# Altium PCB PCB_MedicalThings_3_2022-05-04.pcbdoc
Units mil, origin at the board's own origin, x right, y up, seen from the top; angles counter-clockwise.
Board outline 6035 x 5207.5 mil, 2 copper layers (Top Layer, Bottom Layer); 117 components, 94 nets, 512 pads, 273 vias.
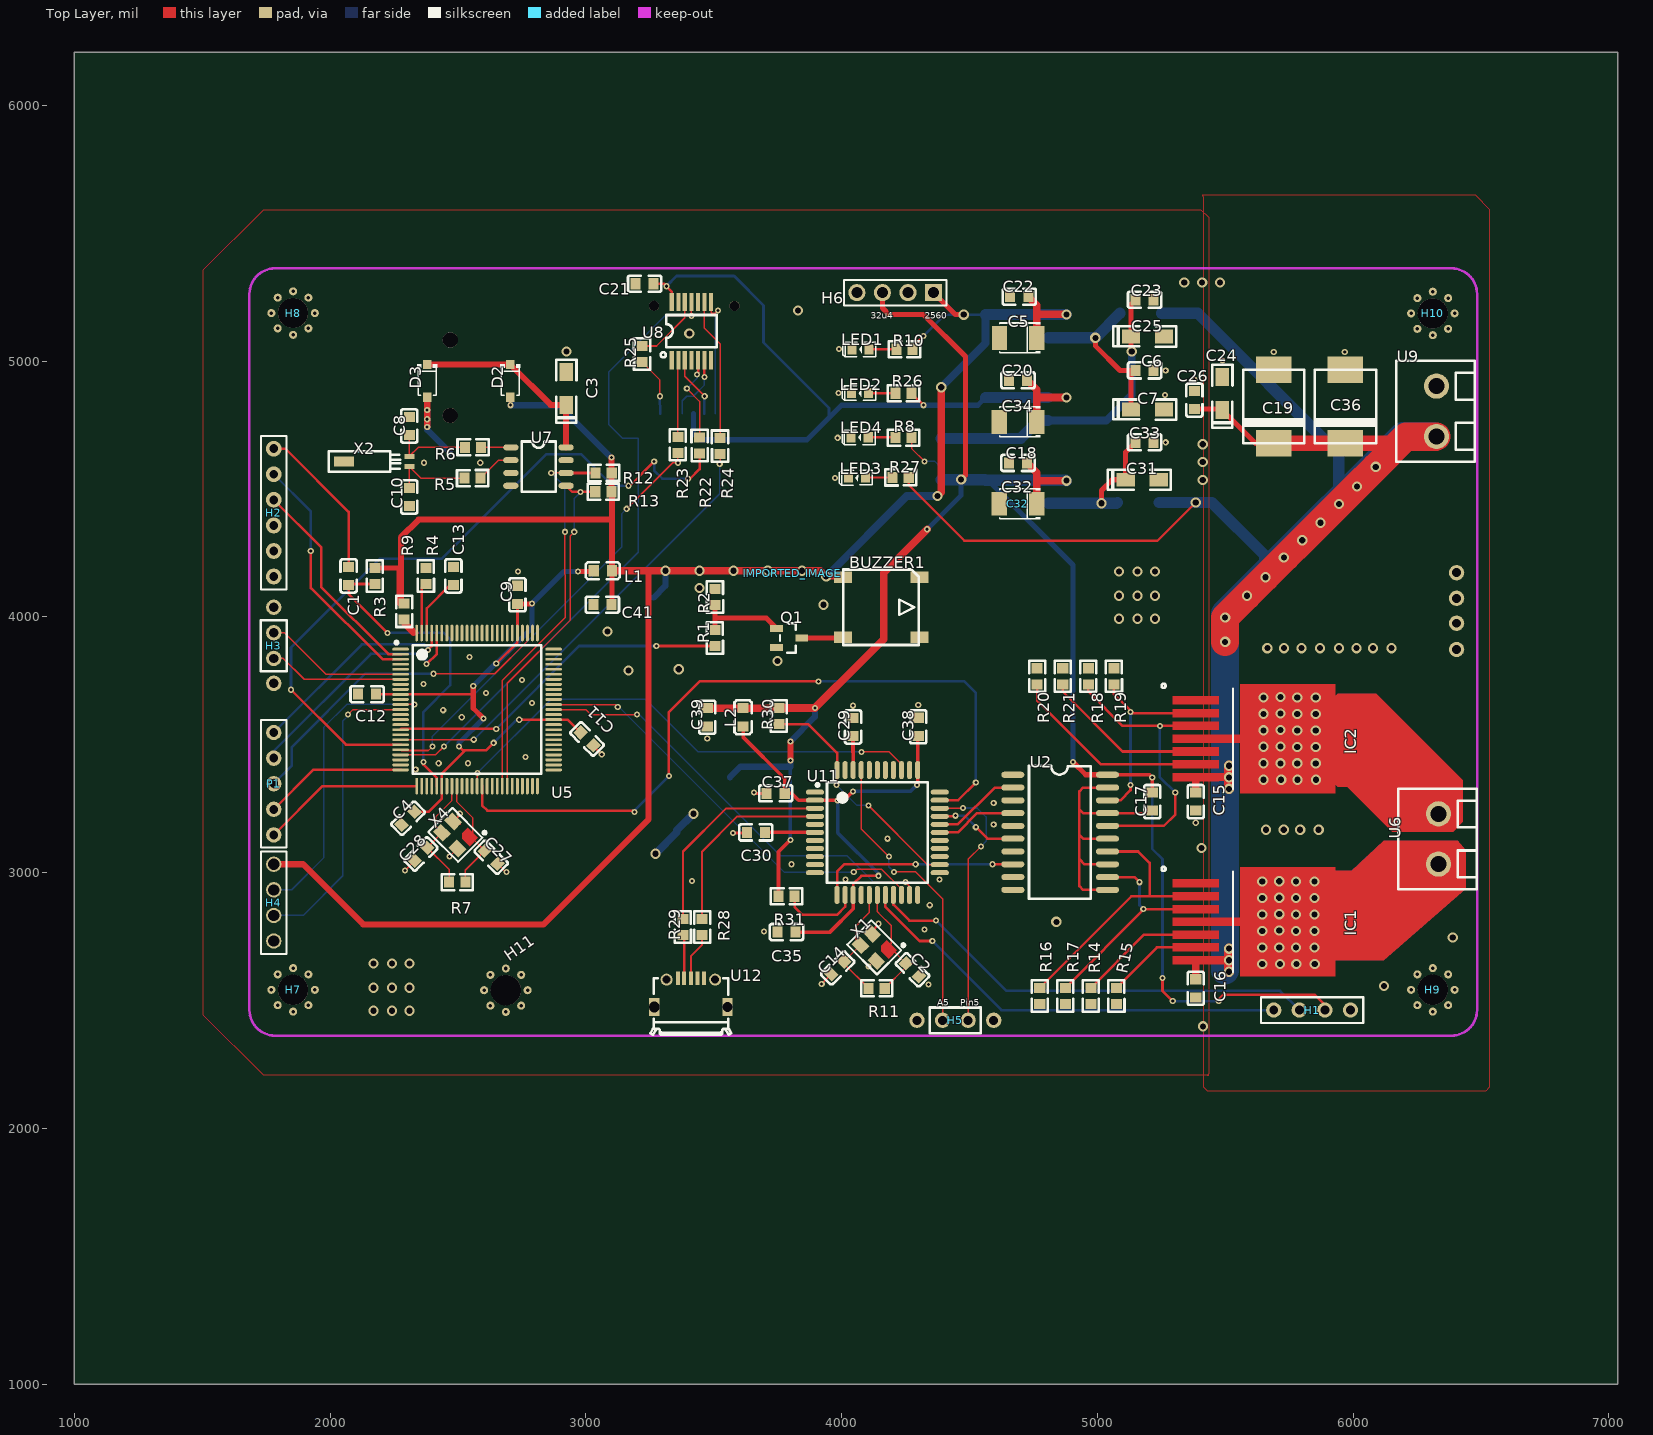
[diagram p0: Top Layer view]
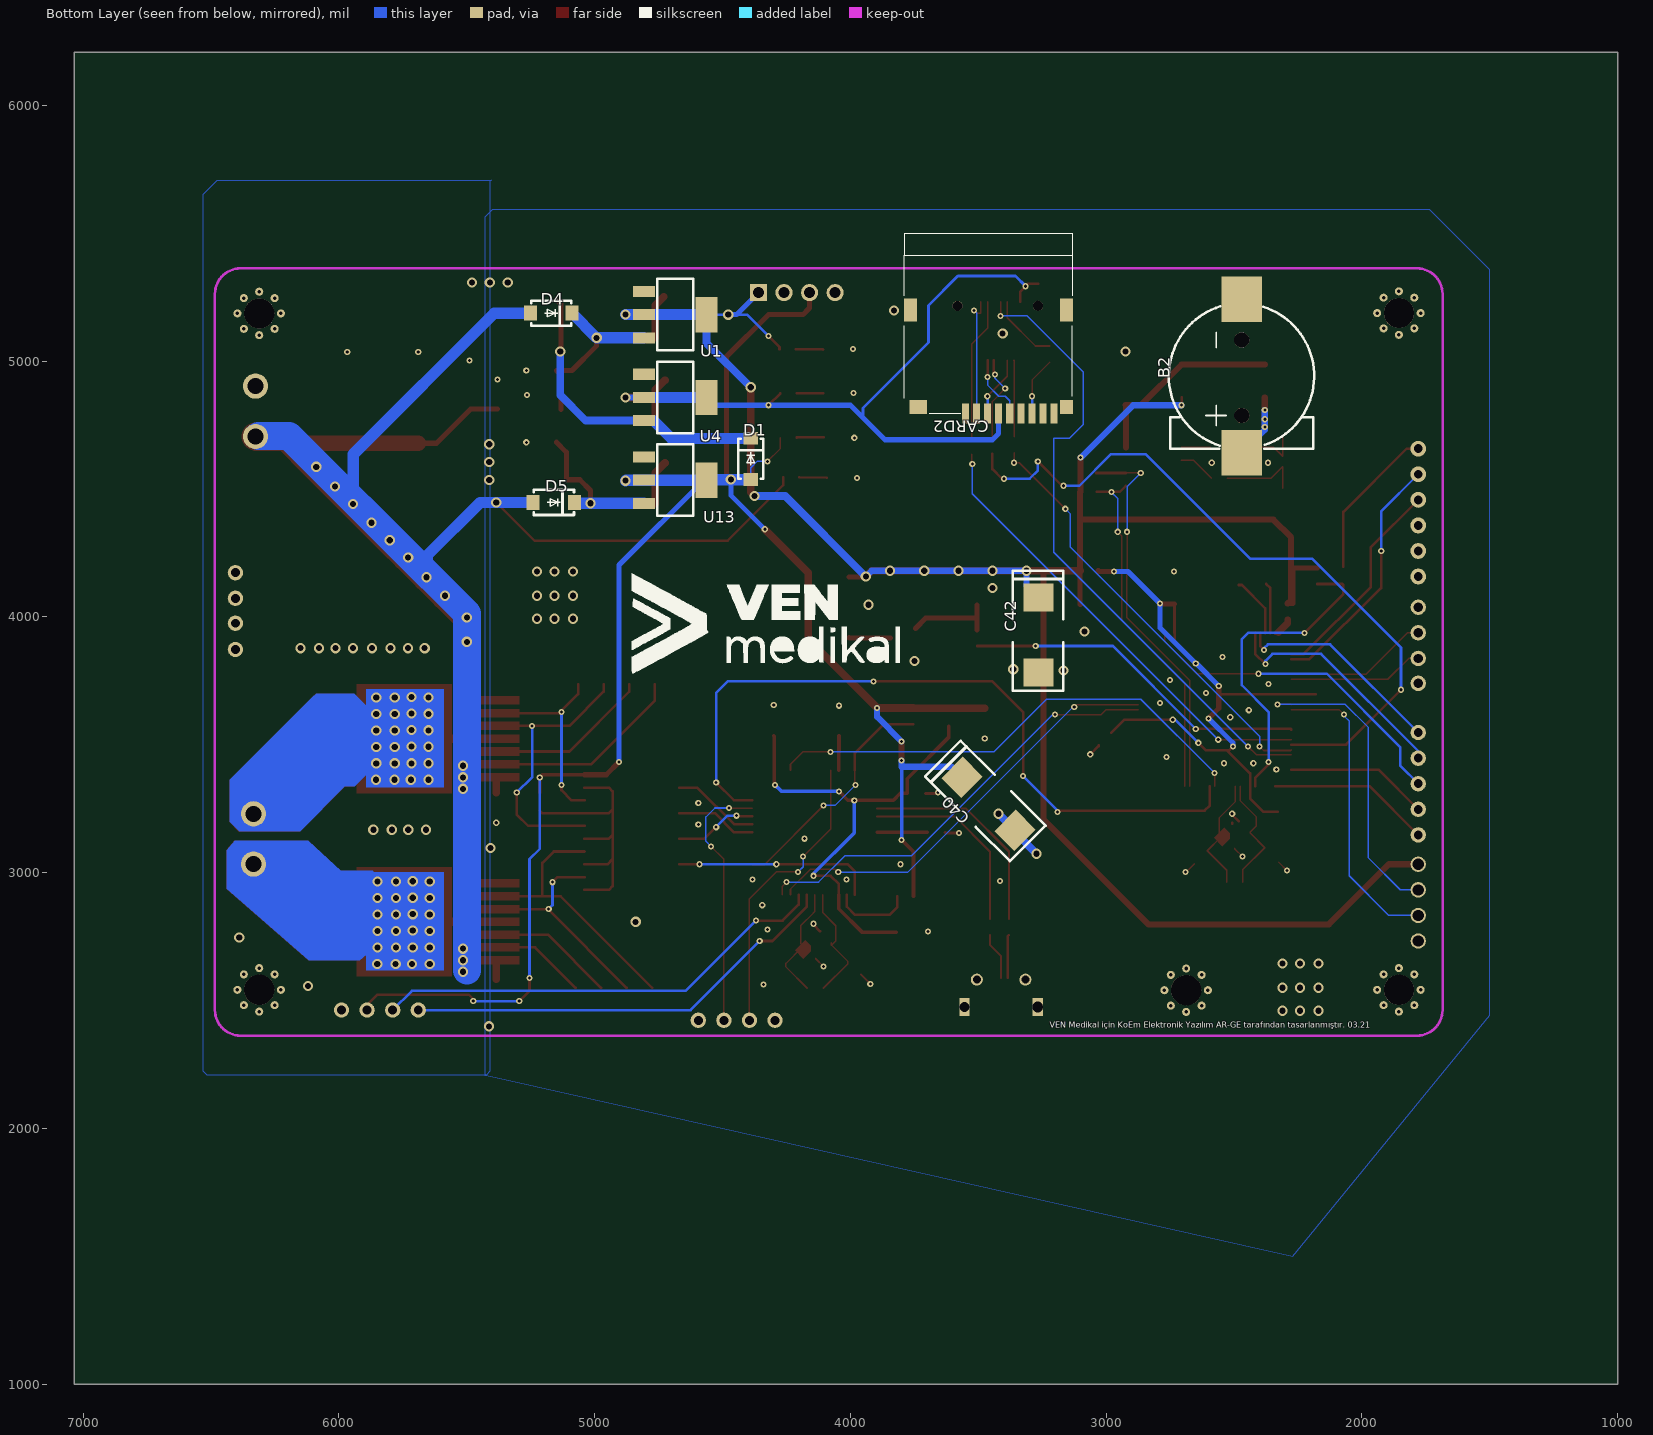
[diagram p1: Bottom Layer view, seen from below]

## Layer stack, top to bottom
Top Layer: signal copper (thickness not stored)
Dielectric: dielectric 12.6, FR-4, Dk 4.8
Bottom Layer: signal copper (thickness not stored)

## Board outline
7035,1000 1000,1000 1000,6207.5 7035,6207.5

## Components (designator, comment, footprint, x,y, rotation, side; value= is the part's Value field where it differs from the comment)
B2 "CR1220-2" BAT-SMD_CR1220-2 2470,4941.25 r270 bottom
BUZZER1 "BUZZER 7.5X7.5X2.5MM" SMD-BUZZER-7.5X7.5X2.5 4155,4037.5 r0 top
C1 "100n" C0603 2072.5,4160 r90 top
C2 "22p" C0603 4277.5,2620 r135 top
C3 "10uF" CASE-A_3216 2925,4897.5 r270 top
C4 "100n" C0603 2305,3212.5 r45 top
C5 "22uF" CASE-B_3528 4690.39,5090.86 r180 top
C6 "100n" C0603 5185,4963.52 r180 top
C7 "10uF" CASE-A_3216 5200.8,4809.89 r180 top
C8 "10p" C0603 2310,4746.25 r270 top
C9 "100n" C0603 2732.86,4086.08 r270 top
C10 "10p" C0603 2310,4468.75 r90 top
C11 "100n" C0603 3005,3522.5 r135 top
C12 "100n" C0603 2145,3697.5 r0 top
C13 "100n" C0603 2482.5,4160 r90 top
C14 "22p" C0603 3985,2627.5 r45 top
C15 "470n" C0603 5385,3277.5 r90 top
C16 "470n" C0603 5385,2547.5 r90 top
C17 "100n" C0603 5215,3277.5 r270 top
C18 "22uF" CASE-B_3528 4690,4762.63 r180 top
C19 "330uF" CASE-V_7361 5690,4822.5 r90 top
C20 "100n" C0603 4690,4925.18 r0 top
C21 "100n" C0603 3230,5302.5 r180 top
C22 "100n" C0603 4695,5251.85 r0 top
C23 "100n" C0603 5185,5239.87 r0 top
C24 "10uF" CASE-A_3216 5490,4877.5 r270 top
C25 "10uF" CASE-A_3216 5200.8,5095.44 r180 top
C26 "0.1u" C0603 5380,4847.5 r270 top
C27 "22p" C0603 2630,3060 r135 top
C28 "22p" C0603 2355,3072.5 r45 top
C29 "100n" C0603 4045,3569.47 r90 top
C30 "1u" C0603 3665,3156.97 r180 top
C31 "10uF" CASE-A_3216 5180,4535 r180 top
C32 "22uF" CASE-B_3528 4690,4442.22 r180 top
C33 "100n" C0603 5185,4682.5 r180 top
C34 "100n" C0603 4690,4601.64 r0 top
C35 "100n" C0603 3785,2767.5 r180 top
C36 "330uF" CASE-V_7361 5970,4822.5 r90 top
C37 "100n" C0603 3742.5,3310 r0 top
C38 "100n" C0603 4300,3570 r90 top
C39 "10u" C0603 3475,3607.5 r270 top
C40 "1u" CASE-D_7343 3468.75,3263.75 r225 bottom
C41 "10u" C0603 3065,4047.5 r0 top
C42 "1u" CASE-D_7343 3275,3931.25 r270 bottom
CARD2 "TF-01A" TF-SMD_TF-01A 3460,4997.5 r180 bottom
D1 "M7" SMA(DO-214AC) 4390,4617.5 r270 bottom
D2 "1N4148W" SOD-123_L3.1-W1.7-LS3.7-RD 2705,4922.5 r270 top
D3 "1N4148W" SOD-123_L3.1-W1.7-LS3.7-RD 2380,4922.5 r270 top
D4 "M7" SMA(DO-214AC) 5170,5187.5 r0 bottom
D5 "M7" SMA(DO-214AC) 5160,4447.5 r0 bottom
H1 "Header-Male-2.54_1x4" HDR-TH_4P-P2.54-V#1 5840,2462.5 r180 top
H2 "HDR-F-2.54_1x6" HDR-F-2.54_1X6 1780,4457.5 r270 top
H3 "Header-Male-2.54_1x2" HDR-TH_2P-P2.54-V#1 1780,3887.5 r270 top
H4 "Header-Male-2.54_1x4" HDR-TH_4P-P2.54-V#2 1780,2882.5 r270 top
H5 "Header-Male-2.54_1x2" HDR-TH_2P-P2.54-V#2 4445,2422.5 r0 top
H6 "Header-Male-2.54_1x4" HDR-TH_4P-P2.54-V#3 4210,5267.5 r180 top
H7 "3_2MMMOUNTHOLE COPY" HOLE_3.0IDX5.8OD 1855.69,2541.61 r0 top
H8 "3_2MMMOUNTHOLE COPY" HOLE_3.0IDX5.8OD 1855.69,5187.77 r0 top
H9 "3_2MMMOUNTHOLE COPY" HOLE_3.0IDX5.8OD 6311.8,2541.61 r0 top
H10 "3_2MMMOUNTHOLE COPY" HOLE_3.0IDX5.8OD 6311.8,5186.2 r0 top
H11 "3_2MMMOUNTHOLE COPY" HOLE_3.0IDX5.8OD 2687.5,2540 r0 top
IC1 "BTS7960B-BTS7960B" PG-TO263-7 5545,2857.5 r90 top
IC2 "BTS7960B-BTS7960B" PG-TO263-7 5545.01,3573.49 r90 top
IMPORTED_IMAGE "IMPORTED_IMAGE" IMPORTED_IMAGE 3806.57,4171.07 r0 top
L1 "10uH" L0603 3066.56,4180.35 r0 top
L2 "10uH" L0603 3615,3607.5 r90 top
LED1 "LED-0603_R" LED0603_RED 4074.06,5045.37 r180 top
LED2 "LED-0603_R" LED0603_RED 4072.5,4875 r180 top
LED3 "LED-0603_R" LED0603_RED 4060,4544.22 r180 top
LED4 "LED-0603_R" LED0603_RED 4070.94,4702.08 r180 top
P1 "2.54mm 1*5P Header" HDR-TH_5P-P2.54-V 1780,3347.5 r270 top
Q1 "2222ALT1G" SOT-23-3_L2.9-W1.3-P1.90-LS2.4-BR 3795,3917.5 r180 top
R1 "820" R0603 3505,3917.5 r90 top
R2 "47k" R0603 3505,4077.5 r270 top
R3 "10k" R0603 2175.05,4159.99 r90 top
R4 "0" R0603 2375,4159.99 r90 top
R5 "40.2k" R0603 2557.5,4542.5 r0 top
R6 "40.2k" R0603 2559.38,4662.5 r0 top
R7 "1M" R0603 2497.5,2962.5 r180 top
R8 "1k" R0603 4242.3,4700.76 r180 top
R9 "0" R0603 2290,4021.25 r90 top
R10 "1k" R0603 4245.99,5046.23 r180 top
R11 "1M" R0603 4137.5,2547.5 r180 top
R12 "10k" R0603 3070,4562.5 r0 top
R13 "10k" R0603 3068.44,4489.04 r0 top
R14 "10k" R0603 4975,2517.5 r90 top
R15 "10k" R0603 5075,2517.5 r90 top
R16 "10k" R0603 4775,2517.5 r90 top
R17 "10k" R0603 4875,2517.5 r90 top
R18 "10k" R0603 4965,3767.5 r270 top
R19 "10k" R0603 5065,3767.5 r270 top
R20 "10k" R0603 4765,3767.5 r270 top
R21 "10k" R0603 4865,3767.5 r270 top
R22 "3.3k" R0603 3445,4670.01 r270 top
R23 "3.3k" R0603 3360,4672.5 r270 top
R24 "3.3k" R0603 3525,4667.5 r90 top
R25 "3.3k" R0603 3220,5027.5 r90 top
R26 "1k" R0603 4242.4,4874.3 r180 top
R27 "1k" R0603 4231.36,4545.18 r180 top
R28 "22" R0603 3455,2787.5 r90 top
R29 "22" R0603 3380,2787.5 r90 top
R30 "0" R0603 3755,3611.96 r90 top
R31 "10k" R0603 3785,2907.5 r180 top
U1 "AMS1117-5.0" SOT-223_L6.7-W3.5-P2.30-BR 4684.92,5181.52 r180 bottom
U2 "74HC244D,653" SOIC-20_L13.0-W7.6-P1.27-LS10.6-BL 4855,3157.5 r270 top
U4 "AMS1117-3.3_C369933" SOT-223_L6.7-W3.5-P2.30-BR 4684.92,4857.97 r180 bottom
U5 "ATMEGA2560-16AU" TQFP-100_L14.0-W14.0-P0.50-LS16.0-BL 2575,3637.5 r270 top
U6 "DB126V-5.0-2P" CONN-TH_2P-P5.00_L7.8-W10.0 6334.12,3131.44 r90 top
U7 "PCF8563T/5,518" SOIC-8_L5.0-W4.0-P1.27-LS6.0-BL 2815,4587.5 r270 top
U8 "74LVC125APW,118" TSSOP-14 3419,5115.5 r90 top
U9 "DB126V-5.0-2P" CONN-TH_2P-P5.00_L7.8-W10.0 6326.25,4803.75 r90 top
U11 "ATMEGA32U4-AU" QFP-44_L10.0-W10.0-P0.80-LS13.2-BL 4140,3156.97 r270 top
U12 "USB" "MICRO USB" 3385,2487.5 r0 top
U13 "AMS1117-5.0" SOT-223_L6.7-W3.5-P2.30-BR 4684.92,4534.43 r180 bottom
X1 "16MHz" OSC-SMD_4P-L3.2-W2.5-BL 4127.5,2707.5 r135 top
X2 "32.768KHz" OSC-TH_BD2.0-P0.70-D0.3 2295,4607.5 r0 top
X4 "16MHz" OSC-SMD_4P-L3.2-W2.5-BL 2490,3147.5 r135 top

## Footprints (in the part's own frame and the unit in brackets; to place one, negate y for a bottom-side part, rotate by r counter-clockwise, add the part's x,y. Pads: shape width x height; smd on the part's side, far side on the other; paste and mask are expansions set on the pad)
BAT-SMD_CR1220-2 [mm]
  rect 4.5x4 smd: 1(7.62,0) 2(-7.62,0)
  round 1.5 hole 1.5 unplated: ""(-3.581,0) ""(3.912,0)
  silkscreen extent -6.92,-7.25 7.22,7.19
C0603 [mm]
  rect 1x1.1 smd: 1(-0.9,0) 2(0.9,0)
  silkscreen extent -1.65,-0.8 1.65,0.8
CASE-A_3216 [mil]
  rect 71.5x53.5 smd: 1(69,-1) 2(-60,-1)
  silkscreen extent -107,-40 139,39
CASE-B_3528 [mil]
  rect 59.3x93.54 smd: 1(-73.25,0) 2(73.25,0)
  silkscreen extent -87,-61 72,61
CASE-D_7343 [mil]
  rect 110.2x118.5 smd: 1(-144,10) 2(149,10)
  silkscreen extent -249,-90 220,107
CASE-V_7361 [mm]
  rect 2.6x3.5 smd: 1(-3.65,0) 2(3.65,0)
  silkscreen extent -3.65,-3.05 3.65,3.05
CONN-TH_2P-P5.00_L7.8-W10.0 [mm]
  round 2.5 hole 1.6: 1(-2.5,0) 2(2.5,0)
  silkscreen extent -5,-3.8 5,4
HDR-F-2.54_1X6 [mil]
  round 62 hole 35: 1(-200,0) 2(-100,0) 3(0,0) 4(100,0) 5(200,0) 6(300,0)
  silkscreen extent -250,-50 350,50
HDR-TH_2P-P2.54-V#1 [mil]
  round 60 hole 36: 1(-50,0) 2(50,0)
  silkscreen extent -100,-50 100,50
HDR-TH_2P-P2.54-V#2 [mil]
  round 60 hole 35: 1(-50,0) 2(50,0)
  silkscreen extent -100,-50 100,50
HDR-TH_4P-P2.54-V#1 [mil]
  round 60 hole 35: 1(-150,0) 2(-50,0) 3(50,0) 4(150,0)
  silkscreen extent -200,-50 200,50
HDR-TH_4P-P2.54-V#2 [mil]
  round 60 hole 43.31: 1(-150,0) 2(-50,0) 3(50,0) 4(150,0)
  silkscreen extent -200,-50 200,50
HDR-TH_4P-P2.54-V#3 [mil]
  rect 66.93x66.93 hole 43.31: 1(-150,0)
  round 66.93 hole 43.31: 2(-50,0) 3(50,0) 4(150,0)
  silkscreen extent -200,-50 200,50
HDR-TH_5P-P2.54-V [mil]
  round 60 hole 35: 1(-200,0) 2(-100,0) 3(0,0) 4(100,0) 5(200,0)
  silkscreen extent -250,-50 250,50
HOLE_3.0IDX5.8OD [mm]
  round 0.8 hole 0.35: 1(-2.159,0) 1(-1.53,-1.527) 1(-1.527,1.527) 1(0,-2.159) 1(0,2.159) 1(1.525,-1.527) 1(1.527,1.527) 1(2.159,0)
  round 3 hole 3 unplated: ""(0,0)
IMPORTED_IMAGE [mil]
L0603 [mm]
  rect 1x1.1 smd: 1(-0.9,0) 2(0.9,0)
  silkscreen extent -1.68,-0.85 1.68,0.85
LED0603_RED [mm]
  rect 0.9x1 smd: 1(-0.85,0) 2(0.85,0)
  silkscreen extent -1.54,-0.73 1.75,0.73
"MICRO USB" [mil]
  rect 15.7x53.1 smd: 1(-25,100) 2(0,100) 3(26,100) 4(52,100) 5(77,100)
  rect 40x72 hole 40 slot 41 at 90 deg: 5(-117,-13)
  round 47.2 hole 31.4: 5(-69,94) 5(121,94)
  rect 40x72 hole 40: 5(169,-13)
  silkscreen extent -132,-122 184,99
OSC-SMD_4P-L3.2-W2.5-BL [mm]
  round 0 smd: 1(-1.1,-0.8)
  rect 1.4x1.15 smd: 2(1.1,-0.8) 3(1.1,0.8) 4(-1.1,0.8)
  Top Layer region: -1.8,-0.225 -0.762,-0.225 -0.4,-0.604 -0.4,-1.375 -1.8,-1.375
  silkscreen extent -2.1,-2.35 2.1,1.7
OSC-TH_BD2.0-P0.70-D0.3 [mm]
  rect 1x0.5 smd: 1(0.381,0.508) 2(0.381,-0.508)
  rect 2x1 smd: ""(-6.096,0)
  silkscreen extent -7.6,-1 -0.54,1
PG-TO263-7 [mil]
  round 0 smd: 1(99.99,160.24) 2(49.99,160.24) 3(-0.01,160.24) 4(-50.01,160.24) 5(-100.01,160.24) 6(-150.01,160.24) 7(-200.01,160.24) 8(-50.01,-199.99)
  Top Layer region: 115.74,69.69 84.24,69.69 84.24,250.79 115.74,250.79
  Top Layer region: 65.74,69.69 34.24,69.69 34.24,250.79 65.74,250.79
  Top Layer region: 15.74,69.69 -15.76,69.69 -15.76,250.79 15.74,250.79
  Top Layer region: -34.26,69.69 -65.76,69.69 -65.76,250.79 -34.26,250.79
  Top Layer region: -84.26,69.69 -115.76,69.69 -115.76,250.79 -84.26,250.79
  Top Layer region: -134.26,69.69 -165.76,69.69 -165.76,250.79 -134.26,250.79
  Top Layer region: -184.26,69.69 -215.76,69.69 -215.76,250.79 -184.26,250.79
  Top Layer region: 162.59,-14.95 162.59,-385.03 -262.61,-385.03 -262.61,-14.95
  silkscreen extent -247,14 165,294
QFP-44_L10.0-W10.0-P0.80-LS13.2-BL [mm]
  oval 0.5x1.8 smd: 1(-4,-6.2) 2(-3.2,-6.2) 3(-2.4,-6.2) 4(-1.6,-6.2) 5(-0.8,-6.2) 6(0,-6.2) 7(0.8,-6.2) 8(1.6,-6.2) 9(2.4,-6.2) 10(3.2,-6.2) 11(4,-6.2) 23(4,6.2) 24(3.2,6.2) 25(2.4,6.2) 26(1.6,6.2) 27(0.8,6.2) 28(0,6.2) 29(-0.8,6.2) 30(-1.6,6.2) 31(-2.4,6.2) 32(-3.2,6.2) 33(-4,6.2)
  oval 1.8x0.5 smd: 12(6.2,-4) 13(6.2,-3.2) 14(6.2,-2.4) 15(6.2,-1.6) 16(6.2,-0.8) 17(6.2,0) 18(6.2,0.8) 19(6.2,1.6) 20(6.2,2.4) 21(6.2,3.2) 22(6.2,4) 34(-6.2,4) 35(-6.2,3.2) 36(-6.2,2.4) 37(-6.2,1.6) 38(-6.2,0.8) 39(-6.2,0) 40(-6.2,-0.8) 41(-6.2,-1.6) 42(-6.2,-2.4) 43(-6.2,-3.2) 44(-6.2,-4)
  silkscreen extent -5,-6.08 5,5
R0603 [mm]
  rect 1x1.1 smd: 1(-0.8,0) 2(0.8,0)
  silkscreen extent -1.55,-0.8 1.55,0.81
SMA(DO-214AC) [mil]
  rect 50x57.9 smd: 1(81,0) 2(-81,0)
  silkscreen extent -79,-49 78,49
SMD-BUZZER-7.5X7.5X2.5 [mm]
  rect 1.78x1.15 smd: 1(-3.8,3) 2(-3.8,-3) 3(3.8,-3) 4(3.8,3)
  silkscreen extent -3.75,-3.75 3.75,3.75
SOD-123_L3.1-W1.7-LS3.7-RD [mm]
  rect 0.91x0.84 smd: 1(-1.63,0) 2(1.63,0)
  silkscreen extent -1.63,-0.98 1.4,0.98
SOIC-8_L5.0-W4.0-P1.27-LS6.0-BL [mm]
  oval 0.6x1.52 smd: 1(-1.905,-2.74) 2(-0.635,-2.74) 3(0.635,-2.74) 4(1.905,-2.74) 5(1.905,2.74) 6(0.635,2.74) 7(-0.635,2.74) 8(-1.905,2.74)
  silkscreen extent -2.49,-1.67 2.5,1.7
SOIC-20_L13.0-W7.6-P1.27-LS10.6-BL [mm]
  oval 0.6x2.3 smd: 1(-5.715,-4.7) 2(-4.445,-4.7) 3(-3.175,-4.7) 4(-1.905,-4.7) 5(-0.635,-4.7) 6(0.635,-4.7) 7(1.905,-4.7) 8(3.175,-4.7) 9(4.445,-4.7) 10(5.715,-4.7) 11(5.715,4.7) 12(4.445,4.7) 13(3.175,4.7) 14(1.905,4.7) 15(0.635,4.7) 16(-0.635,4.7) 17(-1.905,4.7) 18(-3.175,4.7) 19(-4.445,4.7) 20(-5.715,4.7)
  silkscreen extent -6.6,-3.1 6.6,3.05
SOT-23-3_L2.9-W1.3-P1.90-LS2.4-BR [mm]
  rect 1.25x0.7 smd: 1(1.25,-0.95) 2(1.25,0.95) 3(-1.25,0)
  silkscreen extent -0.65,-1.46 0.9,1.46
SOT-223_L6.7-W3.5-P2.30-BR [mm]
  rect 2.2x1.1 smd: 1(-3.099,2.3) 2(-3.099,0) 3(-3.099,-2.3)
  rect 2.2x3.5 smd: 4(3.099,0)
  silkscreen extent -1.8,-3.55 1.8,3.55
TF-SMD_TF-01A [mm]
  rect 0.7x2 smd: 1(-2.292,-5.145) 2(-1.192,-5.143) 3(-0.096,-5.145) 4(1.004,-5.145) 5(2.103,-5.145) 6(3.201,-5.145) 7(4.297,-5.145) 8(5.395,-5.145) 9(6.499,-5.145)
  rect 1.27x1.397 smd: 10(7.747,-4.507)
  rect 1.27x2.286 smd: 11(7.747,5.145) 12(-7.747,5.145)
  rect 1.778x1.397 smd: 13(-6.985,-4.507)
  round 1 hole 1 unplated: ""(-3.084,5.554) ""(4.915,5.557)
  silkscreen extent -8.39,-5.14 8.31,12.76
TQFP-100_L14.0-W14.0-P0.50-LS16.0-BL [mm]
  oval 0.28x1.65 smd: 1(-6,-7.6) 2(-5.5,-7.6) 3(-5,-7.6) 4(-4.5,-7.6) 5(-4,-7.6) 6(-3.5,-7.6) 7(-3,-7.6) 8(-2.5,-7.6) 9(-2,-7.6) 10(-1.5,-7.6) 11(-1,-7.6) 12(-0.5,-7.6) 13(0,-7.6) 14(0.5,-7.6) 15(1,-7.6) 16(1.5,-7.6) 17(2,-7.6) 18(2.5,-7.6) 19(3,-7.6) 20(3.5,-7.6) 21(4,-7.6) 22(4.5,-7.6) 23(5,-7.6) 24(5.5,-7.6) 25(6,-7.6) 51(6,7.6) 52(5.5,7.6) 53(5,7.6) 54(4.5,7.6) 55(4,7.6) 56(3.5,7.6) 57(3,7.6) 58(2.5,7.6) 59(2,7.6) 60(1.5,7.6) 61(1,7.6) 62(0.5,7.6) 63(0,7.6) 64(-0.5,7.6) 65(-1,7.6) 66(-1.5,7.6) 67(-2,7.6) 68(-2.5,7.6) 69(-3,7.6) 70(-3.5,7.6) 71(-4,7.6) 72(-4.5,7.6) 73(-5,7.6) 74(-5.5,7.6) 75(-6,7.6)
  oval 1.65x0.28 smd: 26(7.6,-6) 27(7.6,-5.5) 28(7.6,-5) 29(7.6,-4.5) 30(7.6,-4) 31(7.6,-3.5) 32(7.6,-3) 33(7.6,-2.5) 34(7.6,-2) 35(7.6,-1.5) 36(7.6,-1) 37(7.6,-0.5) 38(7.6,0) 39(7.6,0.5) 40(7.6,1) 41(7.6,1.5) 42(7.6,2) 43(7.6,2.5) 44(7.6,3) 45(7.6,3.5) 46(7.6,4) 47(7.6,4.5) 48(7.6,5) 49(7.6,5.5) 50(7.6,6) 76(-7.6,6) 77(-7.6,5.5) 78(-7.6,5) 79(-7.6,4.5) 80(-7.6,4) 81(-7.6,3.5) 82(-7.6,3) 83(-7.6,2.5) 84(-7.6,2) 85(-7.6,1.5) 86(-7.6,1) 87(-7.6,0.5) 88(-7.6,0) 89(-7.6,-0.5) 90(-7.6,-1) 91(-7.6,-1.5) 92(-7.6,-2) 93(-7.6,-2.5) 94(-7.6,-3) 95(-7.6,-3.5) 96(-7.6,-4) 97(-7.6,-4.5) 98(-7.6,-5) 99(-7.6,-5.5) 100(-7.6,-6)
  silkscreen extent -6.8,-8.15 6.37,6.37
TSSOP-14 [mil]
  rect 71x16 smd: 1(-112,83) 2(-112,57) 3(-112,32) 4(-112,6) 5(-112,-20) 6(-112,-45) 7(-112,-71) 8(116,-71) 9(116,-45) 10(116,-20) 11(116,6) 12(116,32) 13(116,57) 14(116,83)
  silkscreen extent -101,-92 65,126

## Free pads (board coordinates)
  round 60 hole 36: 2(1779.99,4037.5) 2(1780,3740.01)
  round 60 hole 35: 2(4295,2422.5) 2(4595,2422.5) 2(6405,3872.5) 2(6405,3975) 2(6405,4072.5) 2(6405,4172.5)

## Via types
v1: diameter 24, hole 12, Top Layer to Bottom Layer, tented both sides, 140 vias
v2: diameter 40, hole 24, Top Layer to Bottom Layer, tented both sides, 133 vias

## Nets (pads, with @x,y where several pads share a name; then routed paths per layer and width w, separated by ;. In a path a pad name is that pad's centre, name@x,y a point inside that pad or via, vN(x,y) a via of type N, cw(c..) or ccw(c..) an arc to the next point about the centre after c; other vN are vias at no path point)
3.3V: C18.1 C20.2 C21.1 CARD2.4 R26.1 U4.2 U4.4 U8.14 | length 3069.5
  Top Layer w10: C21.1 3305,5302.5 3336,5271.5 U8.14 ; R26.1 4273.9,4873.6 v1(4320,4827.5)
  Top Layer w30: C20.2 4763.25,4887.37 C18.1@4763.25,4762.63 ; 4763.25,4857.5 v2@4870,4857.5
  Bottom Layer w12: v1(3315,5292.5) 3355,5332.5 3580,5332.5 3695,5217.5 3695,5072.5 3951.21,4816.29 3951.21,4778.71
  Bottom Layer w20: CARD2.4 3420.48,4717.02 3445,4692.5 3865,4692.5 4000,4827.5 v1(4320,4827.5) 4532.45,4827.5 U4.4
  Bottom Layer w24: U4.2 v2@4870,4857.5
  Bottom Layer w44: U4.4 U4.2
  other v2: 4880,4857.5
+5V: BUZZER1.1 C5.1 C22.2 C41.2 C42.1 D2.2 H4.1 H6.1 L1.2 R3.2 R9.2 R10.1 R12.2 R13.2 U1.2 U1.4 | length 9453.9
  Top Layer w10: v1(2705,4827.5) D2.2 ; R10.1 4277.49,5054.99 v1(4320,5097.5)
  Top Layer w20: R3.2 2269.8,4191.5 2269.8,4052.7 R9.2 ; C41.2 3102,4049.06 L1.2 ; v2(3940,4157.5) 3941.89,4155.61 BUZZER1.1 ; H6.1 4445.99,5181.51 v2(4478.09,5181.51)
  Top Layer w24: H4.1 1895,3032.5 2130,2797.5 2835,2797.5 3245,3207.5 3245,4180.3 ; R9.2@2290,4052.75 2277.3,4065.45 2277.3,4310.91 2346.8,4380.41 3101.9,4380.41 ; R13.2 v1(3100,4622.5) ; R13.2 3102,4486.98 L1.2
  Top Layer w30: L1.2 3391,4180.35 3519.6,4180.35 3665.89,4180.35 3917.15,4180.35 v2(3940,4157.5) ; v2(4375,4472.5) 4390,4487.5 v2(4390,4897.5) ; C22.2 4763.64,5218.65 C5.1 ; 4763.64,5182.5 v2(4880,5182.5)
  Bottom Layer w10: v1(4320,5097.5) 4404.01,5181.51 v2(4478.09,5181.51) U1.4
  Bottom Layer w20: H6.1 4445.99,5181.51 v2(4478.09,5181.51)
  Bottom Layer w24: v1(2705,4827.5) 2895,4827.5 v1(3100,4622.5) ; C42.1 3311.25,4121.5 v2(3311.25,4180.35) v2(3845,4180.35) 3917.15,4180.35 v2(3940,4157.5)
  Bottom Layer w30: v2(3940,4157.5) 4255,4472.5 v2(4375,4472.5) ; v2(4390,4897.5) 4562.92,5070.42 U1.4
  Bottom Layer w44: U1.4 4563.91,5182.5 v2(4880,5182.5)
  other v2: 3444.69,4180.35 3578.13,4180.35 3711.56,4180.35
+5V_LEO: C17.1 C32.1 C34.2 C39.1 C40.1 D1.1 H1.2 H6.3 L2.2 R8.1 R30.2 R31.2 U2.20 U13.2 U13.4 | length 7793.3
  Top Layer w6: R8.1 4273.8,4658.7 v1(4325,4607.5)
  Top Layer w10: v1(5255,2587.5) 5255,2537.5 v1(5295,2497.5) ; v1(5475,2497.5) 5475,2505 5492.5,2522.5 5850,2522.5 5890,2482.5 H1.2
  Top Layer w14: R31.2 3753.5,3081 v1(3800,3127.5) ; U2.20 5205,3382.5 v1(5215,3372.5) C17.1
  Top Layer w20: H6.3 4160,5207.5 4166,5201.5 4185,5182.5 4320,5182.5 4485,5017.5 4485,4553.6 v2(4467.86,4536.5) ; v1(4905,3432.5) 4955,3382.5 U2.20
  Top Layer w24: v1(3800,3438.03) v1(3800,3512.5)
  Top Layer w30: C39.1 R30.2 ; R30.2 v1(3895.96,3643.46) 4075,3822.5 4165,3912.5 4165,4172.5 v1(4335,4342.5) ; C34.2 4763.25,4563.83 C32.1@4763.25,4442.22 ; 4763.25,4532.5 v2(4880,4532.5)
  Bottom Layer w6: v1(4325,4607.5) 4365,4607.5 4390,4582.5 D1.1
  Bottom Layer w10: v1(5215,3372.5) 5215,3092.5 5255,3052.5 v1(5255,2587.5) ; v1(5295,2497.5) v1(5475,2497.5)
  Bottom Layer w14: v1(3800,3127.5) v1(3800,3438.03)
  Bottom Layer w20: v1(4335,4342.5) 4467.86,4475.36 v2(4467.86,4536.5) ; U13.4 4573.07,4534.43 4905,4202.5 v1(4905,3432.5)
  Bottom Layer w24: C40.1 3604.6,3413.7 3800,3413.7 v1(3800,3438.03) ; v1(3800,3512.5) 3896,3608.5 v1(3895.96,3643.46)
  Bottom Layer w44: D1.1 v2(4467.86,4536.5) 4560.85,4536.5 U13.4 U13.2 4878.07,4534.43 v2(4880,4532.5)
ADC0: P1.1 U5.97 | length 832.2
  Top Layer w10: v1(2382.5,3870) 2397.84,3885.34 U5.97
  Bottom Layer w10: P1.1 2125,3892.5 2367.5,3892.5 2382.5,3877.5 v1(2382.5,3870)
ADC1: P1.2 U5.96 | length 944.6
  Top Layer w10: v1(2377.5,3815) 2417.53,3855.03 U5.96
  Bottom Layer w10: P1.2 1780,3475 2160,3855 2350,3855 2377.5,3827.5 v1(2377.5,3815)
AREF1: C13.1 U5.98 | length 238.7
  Top Layer w10: U5.98 2378.2,4033.2 2469.6,4124.6 C13.1
B2_1: B2.1 D3.2 | length 406.9
  Top Layer w24: v1(2380,4742.5) D3.2 v1(2380,4809.15) v1(2380,4772.5)
  Bottom Layer w24: v1(2380,4809.15) v1(2380,4772.5) 2380,4731.2 B2.1
BUZZER: R1.1 U5.17 | length 1364.7
  Top Layer w10: U5.17 2279,3561.9 v1(2649.9,3561.9) ; v1(3275.8,3886) R1.1
  Bottom Layer w10: v1(2649.9,3561.9) 2973.9,3886 v1(3275.8,3886)
BUZZER1_2: BUZZER1.2 Q1.3 | length 162
  Top Layer w20: Q1.3 4003.51,3917.5 BUZZER1.2
C6_2: C6.2 C7.1 D4.2 U1.3 | length 712.3
  Top Layer w20: v2(4992.46,5090.96) 4992.5,5060 5089,4963.5 C6.2 ; C7.1 5131.8,4945.76 C6.2
  Bottom Layer w44: U1.3@4808.46,5092.5 U1.3 v2(4992.46,5090.96) D4.2
C38_1: C35.1 C37.2 C38.1 L2.1 U11.2 U11.14 U11.34 | length 1910.8
  Top Layer w10: U11.14 4045.5,2955.5 4077.5,2987.5 v1(4145,2987.5)
  Top Layer w14: L2.1 3615,3530 3777.94,3367.06 C37.2 ; C37.2 3805,3310 3832.1,3282.9 U11.2 ; C35.1 3955,2767.5 4045.51,2858.01 U11.14 ; U11.2@3895.91,3282.95 4010.45,3282.95 v1(4045,3317.5) ; v1(4295,3342.5) 4297.48,3344.98 U11.34 4297.48,3532.05 C38.1
  Bottom Layer w14: v1(3985,3282.5) 3985,3155 4145,2995 v1(4145,2987.5) ; v1(4045,3317.5) 4270,3317.5 v1(4295,3342.5)
CRYSTAL_1: C27.2 R7.1 U5.34 X4.1 | length 469
  Top Layer w6: 2496.27,3276.2 U5.34 ; 2496.3,3276.2 2557.5,3215 2557.5,3153.7 X4.1 ; R7.1 2528.99,3009.11 C27.2 2550.86,3139.14 X4.1
CRYSTAL_2: C28.2 R7.2 U5.33 X4.3 | length 469.2
  Top Layer w6: X4.3 2437.1,3154.6 C28.2 2466,3011.62 R7.2 ; X4.3@2437.1,3158.4 2412.5,3183 2412.5,3217.5 2476.6,3281.6 U5.33
CRYSTAL_3: C2.2 R11.1 U11.17 X1.1 | length 463.3
  Top Layer w6: U11.17 4140,2847.5 4145,2842.5 4195,2792.5 4195,2785 4195,2723.7 4180.4,2709.1 ; R11.1 4252.44,2630.95 C2.2 4188.36,2709.14 4180.4,2709.14
CRYSTAL_4: C14.2 R11.2 U11.16 X1.3 | length 470.1
  Top Layer w6: X1.3 4057.5,2732.95 4057.5,2792.5 4108.5,2843.5 U11.16 ; X1.3@4074.6,2725.85 4074.6,2717.1 C14.2 4010.05,2643.45 R11.2
CS_I: R24.1 U5.19 | length 1801.6
  Top Layer w6: U5.19 2276,3519.6 v1(2562.1,3519.6) ; v1(3523.6,4597.7) 3525,4599.1 R24.1
  Bottom Layer w6: v1(2562.1,3519.6) 3523.6,4481.1 v1(3523.6,4597.7)
CS_O: CARD2.2 U8.8 | length 483.2
  Top Layer w6: U8.8 3490,5186.9 3505.3,5186.9 v1(3516.7,5198.2)
  Bottom Layer w6: CARD2.2 3506.9,5188.5 v1(3516.7,5198.2)
D1_2: C23.1 C25.1 D1.2 U4.3 | length 1181
  Top Layer w20: v2(5135,5037.5) 5131.8,5040.7 C25.1 5131.8,5222.1 C23.1
  Bottom Layer w30: U4.3 5034.92,4767.42 5135,4867.5 v2@5135,5022.5
  Bottom Layer w44: D1.2@4390,4697.5 4701,4698.5 4769.9,4767.4 U4.3
D+: R28.1 U12.3 | length 186.7
  Top Layer w8: U12.3 3411,2673.5 3455,2717.5 R28.1
D-: R29.1 U12.2 | length 170.6
  Top Layer w8: R29.1 3385,2751.01 U12.2
DTR: C1.2 H2.1 | length 609.6
  Top Layer w10: H2.1 1825,4657.5 2072.5,4410 2072.5,4212.9 C1.2
EN_CHA: H1.3 U11.19 | length 1796
  Top Layer w10: U11.19 4202.99,2874.51 4265,2812.5 v1(4370,2812.5)
  Bottom Layer w10: v1(4370,2812.5) 4645,2537.5 5715,2537.5 H1.3
EN_CHB: H1.4 U11.18 | length 1732.5
  Top Layer w10: U11.18 4171.5,2866 4305,2732.5 v1(4355,2732.5)
  Bottom Layer w10: v1(4355,2732.5) 4625,2462.5 H1.4
GND: B2.2 C2.1 C3.2 C4.1 C5.2 C6.1 C7.2 C8.1 C9.1 C10.1 C11.1 C12.1 C13.2 C14.1 C15.1 C16.1 C17.2 C18.2 C19.2 C20.1 C21.2 C22.1 C23.2 C24.2 C25.2 C26.1 C27.1 C28.1 C29.2 C30.2 C31.2 C32.2 C33.1 C34.1 C35.2 C36.2 C37.1 C38.2 C39.2 C40.2 C41.1 C42.2 CARD2.6 CARD2.10 CARD2.11 CARD2.12 CARD2.13 H1.1 H2.6 H4.4 H6.2 H6.4 H11.1 IC1.1 IC2.1 LED1.2 LED2.2 LED3.2 LED4.2 pad.2 Q1.2 R2.1 R4.2 R14.1 R15.1 R16.1 R17.1 R18.1 R19.1 R20.1 R21.1 U1.1 U2.1 U2.10 U2.11 U2.13 U2.15 U2.17 U2.19 U4.1 U5.11 U5.32 U5.62 U5.81 U7.4 U8.1 U8.4 U8.7 U8.10 U8.13 U9.2 U11.5 U11.15 U11.23 U11.35 U11.43 U12.5 U13.1 X1.2 X1.4 X4.2 X4.4 | length 1822
  Top Layer w6: v1(2292.5,3007.5) C28.1@2324.9,3039.9 ; v1(2467.5,3062.5) 2498.35,3093.35 X4.4 ; C27.1 2687.5,3002.5 v1(2690,3002.5) ; v1(3922.5,2565) C14.1 ; v1(4105,2632.5) 4135.85,2663.35 X1.4@4135.85,2664.6
  Top Layer w10: X4.2@2481.7,3200.4 v1@2507.5,3226.2 ; X4.2@2507.5,3191.2 X4.2@2507.5,3195 ; C11.1 3030.05,3494.95 v1(3062.5,3462.5) ; X1.2@4119.2,2770.4 4145,2796.2 v1(4145,2800) ; U2.17 4945,3232.5 4930,3247.5 ; U2.19 4945,3332.5 4930,3317.5 4930,3247.5 ; U2.11 4945,2932.5 4930,2947.5 4930,3052.5 ; U2.13 4950,3032.5 4930,3052.5 ; U2.15 4945,3132.5 4930,3147.5 ; U2.17 5205.44,3232.5 C17.2 ; 4930,3052.5 4930,3147.5 ; 4930,3147.5 4930,3247.5
  Top Layer w12: v1(3575,3155) 3627.59,3155 C30.2 ; v1(3657.5,3312.5) 3660,3310 C37.1
  Bottom Layer w30: v2(3272.5,3073.75) 3356.32,3157.57 C40.2 ; C40.2 v2@3421.3,3230
  other v1: 4340,2562.5 3697.5,2770 4325,2777.5 4345,2872.5 3415,2967.5 4015,2972.5 4382.5,2972.5 3805,3032.5 4180,3132.5 4595,3187.5 5385,3195 2507.5,3230 4595,3272.5 2335,3402.5 2425,3427.5 2540,3427.5 2765,3452.5 3475,3525 2515,3607.5 2442.5,3635 4045,3652.5 4300,3655 2790,3662.5 2610,3702.5 2365,3737.5 2750,3752.5 2545,3842.5 2735,4177.5 3975,4542.5 2367.5,4602.5 2587.5,4602.5 5267.5,4682.5 3985,4700 5265,4867.5 3987.5,4875 5380,4927.5 5267.5,4962.5 5490,5002.5 5690,5035 5967.5,5035 3990,5047.5
  other v2: 5413.75,2398.75 2170,2460 2242.21,2460 2310.54,2460 2170,2550 2242.21,2550 2310.54,2550 6121.25,2556.25 2170,2645 2242.21,2645 2310.54,2645 6390,2746.25 4840,2807.5 5407.5,3096.25 5660,3167.5 5728.93,3167.5 5793.33,3167.5 5865.54,3167.5 3421.25,3230 3167.5,3790 3363.75,3795 3750,3827.5 5665,3877.5 5730,3877.5 5798.33,3877.5 5870.54,3877.5 5945,3877.5 6013.93,3877.5 6078.33,3877.5 6150.54,3877.5 3085,3942.5 5085,3992.5 5157.21,3992.5 5225.54,3992.5 3930,4047.5 5085,4082.5 5157.21,4082.5 5225.54,4082.5 3445,4112.5 5085,4177.5 5157.21,4177.5 5225.54,4177.5 5412.5,4535 5412.5,4605 5412.5,4675 2925,5037.5 3405,5107.5 3830,5197.5 5340,5307.5 5410,5307.5 5480,5307.5
IC1_5: IC1.5 R14.2 | length 496.1
  Top Layer w10: R14.2 5183.49,2757.49 IC1.5
IC1_6: IC1.6 R15.2 | length 375.4
  Top Layer w10: R15.2 5233.49,2707.49 IC1.6
IC1_IN: IC2.2 R19.2 U2.18 | length 800.5
  Top Layer w10: U2.18 5090,3282.5 5130,3322.5 v1(5130,3342.5) ; R19.2 5065,3697.5 5139,3623.5 IC2.2
  Bottom Layer w10: v1(5130,3342.5) 5130,3572.5 v1(5130,3627.5)
IC1_INH: IC2.3 R18.2 U2.16 | length 1157.3
  Top Layer w10: R18.2 4965,3707.5 5099,3573.5 IC2.3 ; U2.16 5260,3182.5 5305,3227.5 v1(5305,3312.5)
  Bottom Layer w10: v1(5245,3572.5) 5245,3372.5 v1(5305,3312.5)
IC2_IN: IC1.2 R16.2 U2.14 | length 1071.9
  Top Layer w10: R16.2 5133.49,2907.49 IC1.2 ; U2.14 5160,3082.5 5205,3037.5 5205,2907.49
IC2_INH: IC1.3 R17.2 U2.12 | length 882
  Top Layer w10: R17.2 5183.49,2857.49 IC1.3 ; U2.12 5145,2982.5 v1(5165,2962.5)
  Bottom Layer w10: v1(5165,2962.5) 5165,2872.5 v1(5180,2857.5)
L_EN: U2.8 U11.12 | length 791
  Top Layer w10: U11.12 3982.5,3005 4010,3032.5 v1(4290,3032.5) ; v1(4590,3032.5) U2.8
  Bottom Layer w10: v1(4290,3032.5) v1(4590,3032.5)
L_PWM: U2.6 U11.30 | length 324.2
  Top Layer w10: U11.30 4442.46,3219.96 v1(4445,3222.5) ; v1(4525,3177.5) 4570,3132.5 U2.6
  Bottom Layer w10: v1(4445,3222.5) 4480,3222.5 v1(4525,3177.5)
LED2_1: LED2.1 R26.2 | length 104.9
  Top Layer w10: LED2.1 R26.2
LED3_1: LED3.1 R27.2 | length 106.4
  Top Layer w10: LED3.1 R27.2
LED4_1: LED4.1 R8.2 | length 106.9
  Top Layer w10: LED4.1 4209.48,4702.08 R8.2
LEO5: H5.2 U11.31 | length 1019.8
  Top Layer w6: U11.31 4473.96,3251.46 v1(4475,3252.5) ; H5.2 4495,3052.5 v1(4545,3102.5)
  Bottom Layer w6: v1(4475,3252.5) 4530,3252.5 4565,3217.5 4565,3152.5 4565,3122.5 v1(4545,3102.5)
LEO_RX1: U5.64 U11.20 | length 1689.8
  Top Layer w6: U5.64 3115.32,3657.18 v1(3125,3647.5) ; v1(4047.8,3002.2) 4060,3012.5 4157.5,3012.5 4234.5,2935.5 U11.20
  Bottom Layer w6: v1(3125,3647.5) 3130,3647.5 3775.3,3002.2 v1(4047.8,3002.2)
LEO_TX1: U5.63 U11.21 | length 1711.6
  Top Layer w6: U5.63 3000,3637.5 3020,3617.5 v1(3200,3617.5) ; v1(4249.8,2962.7) 4266,2946.6 U11.21
  Bottom Layer w6: v1(3200,3617.5) 3210,3617.5 3761.3,3066.2 4021.3,3066.2 4124.8,2962.7 v1(4249.8,2962.7)
LEOA5: H5.1 U11.41 | length 1160.1
  Top Layer w6: U11.41 4077.01,3170.49 v1(4185,3062.5) ; v1(4205,3002.5) 4290,3002.5 4395,2897.5 H5.1
  Bottom Layer w6: v1(4185,3062.5) 4185,3022.5 v1(4205,3002.5)
M+: IC1.4 IC1.8 U6.1 | length 360.2
  Top Layer w32: IC1.4 IC1.8
  other v2: 5645,2643.11 5713.93,2643.11 5778.33,2643.11 5850.54,2643.11 5711.43,2707.19 5777.08,2707.19 5848.97,2707.19 5645,2707.5 5645,2771.9 5777.08,2771.59 5848.97,2771.59 5711.43,2773.09 5645,2836.29 5777.07,2835.98 5848.97,2835.98 5711.43,2837.49 5777.08,2900.38 5848.97,2900.38 5645,2900.69 5711.43,2901.88 5645,2965.08 5777.07,2964.77 5848.97,2964.77 5711.43,2966.28
M-: IC2.4 IC2.8 U6.2 | length 360.2
  Top Layer w32: IC2.4 IC2.8
  other v2: 5650,3363.11 5718.93,3363.11 5783.33,3363.11 5855.54,3363.11 5716.43,3427.19 5782.08,3427.19 5853.97,3427.19 5650,3427.5 5650,3491.9 5782.08,3491.59 5853.97,3491.59 5716.43,3493.09 5650,3556.29 5782.07,3555.98 5853.97,3555.98 5716.43,3557.49 5782.08,3620.38 5853.97,3620.38 5650,3620.69 5716.43,3621.88 5650,3685.08 5782.07,3684.77 5853.97,3684.77 5716.43,3686.28
MISO_I: U5.22 U8.11 | length 2513.8
  Top Layer w6: U5.22 2412.83,3460.33 v1(2445,3492.5) ; v1(3413,5176.6) U8.11
  Bottom Layer w6: v1(2445,3492.5) 3205,4252.5 3205,4697.5 3145,4697.5 3090,4752.5 3090,4760.8 3090,4957.5 3309.1,5176.6 v1(3413,5176.6)
MISO_O: CARD2.7 R25.1 | length 230.1
  Top Layer w6: R25.1 3290,4926 v1(3290,4862.5)
  Bottom Layer w10: v1(3290,4862.5) CARD2.7
MOSI_I: R23.2 U5.21 | length 1689.4
  Top Layer w6: U5.21 2278.4,3477.4 2384.9,3477.4 v1(2400,3492.5) ; v1(3160,4422.5) 3340,4602.5 v1(3360,4602.5) R23.2
  Bottom Layer w6: v1(2400,3492.5) 2400,3532.5 3140,4272.5 3140,4402.5 v1(3160,4422.5)
MOSI_O: CARD2.3 U8.3 | length 241.4
  Top Layer w6: U8.3 3387,4940.5 v1(3465,4862.5)
  Bottom Layer w10: CARD2.3 3463.76,4861.26 v1(3465,4862.5)
PIN2: H3.1 U5.6 | length 573
  Top Layer w6: H3.1@1780,3947.5 H3.1 1822.5,3937.5 1984.7,3775.3 U5.6
PIN3: H3.2 U5.7 | length 539.7
  Top Layer w6: H3.2@1780,3847.5 H3.2 1817.5,3837.5 1899.4,3755.6 U5.7
PIN12: P1.4 U5.25 | length 559.5
  Top Layer w10: P1.4 1933.77,3401.28 U5.25
PIN13: P1.5 U5.26 | length 637.8
  Top Layer w10: P1.5 1970.78,3338.29 U5.26
PIN22: P1.3 U5.78 | length 1296.6
  Top Layer w6: v1(2405,3777.5) 2643.7,3777.5 2771.9,3905.7 U5.78@2771.9,3936.7
  Bottom Layer w10: P1.3 1850,3417.51 1850,3490 2137.5,3777.5 v1(2405,3777.5)
PIN40: U5.38 U11.36 | length 1956.5
  Top Layer w6: U5.38 2575,3387.9 v1(2576.1,3388.9) ; v1(4077.4,3472.1) 4185.7,3472.1 4234.5,3423.3 U11.36
  Bottom Layer w6: v1(2576.1,3388.9) 2864.7,3677.5 3233.9,3677.5 3439.3,3472.1 v1(4077.4,3472.1)
PIN45: U5.39 U11.32 | length 2925.3
  Top Layer w10: U5.39 2594.7,3262.8 2615,3242.5 3190,3242.5 v1(3190,3237.5) ; v1(3325,3377.5) 3325,3627.5 3445,3747.5 v1(3910,3747.5) ; U11.32@4384.09,3282.95 4455.45,3282.95 v1(4525,3352.5)
  Bottom Layer w10: v1(3190,3237.5) 3185,3237.5 v1(3325,3377.5) ; v1(3910,3747.5) 4480,3747.5 4525,3702.5 v1(4525,3352.5)
Q1_1: Q1.1 R1.2 R2.2 | length 354.4
  Top Layer w20: R1.2 R2.2 ; 3505,3994.99 3705.71,3994.99 Q1.1
R5_1: C10.2 R5.1 X2.2 | length 319.2
  Top Layer w6: C10.2@2310,4502.94 X2.2 2355.01,4542.5 R5.1
R5_2: R5.2 U7.2 | length 147.1
  Top Layer w6: R5.2 2659,4612.5 U7.2
R6_1: C8.2 R6.1 X2.1 | length 316.9
  Top Layer w6: C8.2@2310,4712.06 X2.1 2345,4662.5 R6.1
R6_2: R6.2 U7.1 | length 116.3
  Top Layer w6: R6.2 U7.1
R10_2: LED1.1 R10.2 | length 107
  Top Layer w10: LED1.1 R10.2
R20_2: IC2.6 R20.2 | length 786.4
  Top Layer w10: R20.2 4765,3672.5 5014,3423.5 IC2.6
R21_2: IC2.5 R21.2 | length 645.2
  Top Layer w10: R21.2 4865,3707.5 5099,3473.5 IC2.5
R30_1: R30.1 U11.24 U11.44 | length 933.5
  Top Layer w6: v1(3980,3342.5) 3982.52,3345.02 U11.44 ; v1(4105,3262.5) 4120,3247.5 4320,3047.5 4336.51,3030.99 U11.24
  Top Layer w10: R30.1 3869.56,3580.46 3982.52,3467.5 U11.44
  Bottom Layer w6: v1(3980,3342.5) 4060,3262.5 v1(4105,3262.5)
R_EN: U2.4 U11.28 | length 317.2
  Top Layer w10: U11.28 4455,3156.97 4530.53,3232.5 U2.4
R_PWM: U2.2 U11.29 | length 345
  Top Layer w10: U11.29 4454,3188.5 4600,3332.5 U2.2
RD+: R28.2 U11.4 | length 761.3
  Top Layer w8: R28.2 3455,3082.5 3592.46,3219.96 U11.4
RD-: R29.2 U11.3 | length 849.4
  Top Layer w8: R29.2 3380,3082.5 3548.96,3251.46 U11.3
RST: C1.1 R3.1 U5.30 | length 1249.2
  Top Layer w10: R3.1 2076.43,4128.5 C1.1 2072.5,4090 v1(2225,3937.5) ; v1(2365,3432.5) 2365,3422.5 2417.53,3369.97 U5.30
  Bottom Layer w10: v1(2225,3937.5) 2445,3937.5 2470,3912.5 2470,3732.5 2365,3627.5 v1(2365,3432.5)
RX2: H4.2 U5.12 | length 1203.3
  Top Layer w6: U5.12 v1(2330,3657.5)
  Bottom Layer w6: H4.2 1850,2932.5 1975,3057.5 1975,3567.5 2065,3657.5 v1(2330,3657.5)
RXF: H2.2 U5.3 | length 970.2
  Top Layer w10: v1@1925,4257.5 1925,4112.5 2205.6,3834.3 U5.3@2275.8,3834.3
  Bottom Layer w10: H2.2 1924.55,4412.95 v1@1924.55,4257.5
  other v1: 1924.55,4257.5
S$19: 
S$21: 
S$25: 
S$27: 
S$30: 
S$32: 
S$36: 
SCK_I: R22.2 U5.20 | length 2807.8
  Top Layer w10: v1(1847.5,3715) 2062.5,3500 2110,3500 2275.5,3500 U5.20 ; v1(3167.5,4512.5) 3172.5,4512.5 v1(3267.5,4607.5) ; v1(3400,4540) 3407.5,4540 3445,4577.5 R22.2
  Bottom Layer w10: v1(1847.5,3715) 1847.5,3880 2195,4227.5 2437.5,4227.5 2845,4635 2982.5,4635 3105,4512.5 v1(3167.5,4512.5) ; v1(3267.5,4607.5) 3267.5,4572.5 3300,4540 v1(3400,4540)
SCK_O: CARD2.5 U8.6 | length 259.2
  Top Layer w10: v1(3464,4937.5) U8.6
  Bottom Layer w6: CARD2.5 3377.22,4844.72 3395,4862.5 3420,4862.5 3464,4906.5 v1(3464,4937.5)
SCL: R12.1 U5.43 U7.6 | length 1522
  Top Layer w6: U5.43 2673.4,3750.9 2920,3997.5 v1(2918.43,4332.5) ; v1(2865,4562.5) U7.6
  Top Layer w10: U7.6 R12.1
  Bottom Layer w6: v1(2865,4562.5) 2918.43,4509.07 v1(2918.43,4332.5)
SDA: R13.1 U5.44 U7.5 | length 1391.8
  Top Layer w6: U5.44 2693.12,3740.62 2940,3987.5 2940,4317.5 v1(2955,4332.5)
  Top Layer w10: U7.5 2946.33,4489.04 R13.1
  Bottom Layer w6: v1(2955,4332.5) 2955,4462.5 v1(2980,4487.5)
TX2: H4.3 U5.13 | length 1186.6
  Top Layer w6: v1(2070,3617.5) 2090,3637.5 U5.13
  Bottom Layer w6: H4.3 1895,2832.5 2050,2987.5 2050,3592.5 2070,3612.5 v1(2070,3617.5)
TXF: H2.3 U5.2 | length 836.6
  Top Layer w10: H2.3 1965,4272.5 1965,4117.5 2228.5,3854 U5.2
U5_31: C4.2 C9.2 C11.2 C12.2 L1.1 U5.10 U5.31 U5.61 U5.80 | length 2774.3
  Top Layer w10: C12.2 U5.10 2556.6,3696.6 2560,3700 v1(2560,3730) ; C4.2 2385.1,3237.6 2437.2,3290.3 U5.31 2437.21,3387.5 2527.21,3477.5 ; v1(2505,3492.5) 2520,3477.5 2527.21,3477.5 ; v1(2640,3507.5) 2610,3477.5 2527.21,3477.5 ; v1(2650,3817.5) 2732.5,3900 U5.80 ; v1(2740,3597.5) U5.61 2930,3597.5 C11.2
  Top Layer w12: U5.80 C9.2
  Top Layer w20: v1(2560,3730) 2560,3642.5 v1(2600,3602.5) ; C9.2 2788.14,4050.64 v1(2790,4052.5) ; v1(2970,4177.5) 3028.28,4177.5 L1.1
  Bottom Layer w10: v1(2560,3730) 2562.5,3730 v1(2650,3817.5) ; v1(2640,3507.5) 2730,3597.5 v1(2740,3597.5)
  Bottom Layer w20: v1(2505,3492.5) 2505,3507.5 v1(2600,3602.5) ; v1(2560,3730) 2647.5,3817.5 v1(2650,3817.5) 2790,3957.5 v1(2790,4052.5) 2915,4177.5 v1(2970,4177.5)
U5_99: R4.1 U5.99 | length 198.6
  Top Layer w10: U5.99 2358.47,4111.97 R4.1
U5_100: R9.1 U5.100 | length 153.1
  Top Layer w14: R9.1 2290,3985.5 U5.100 2326.25,3936.71
  Top Layer w24: R9.1 2290,3973.75 2326.25,3937.5
U7_8: C3.1 D2.1 D3.1 U7.8 | length 776
  Top Layer w24: D3.1 D2.1 2863.17,4828.5 C3.1 2922.87,4827.37 U7.8
U8_2: R23.1 U8.2 | length 300.3
  Top Layer w6: R23.1 3360,5001.5 U8.2
U8_5: R22.1 U8.5 | length 338.4
  Top Layer w6: v1(3395,4892.5) 3445,4842.5 R22.1@3445,4704
  Top Layer w10: v1(3435,4947.5) 3439,4951.5 U8.5
  Bottom Layer w6: v1(3395,4892.5) 3435,4932.5 v1(3435,4947.5)
U8_9: R24.2 U8.9 | length 557.8
  Top Layer w6: U8.9 3464,5128.5 3525,5067.5 R24.2
U8_12: R25.2 U8.12 | length 274.8
  Top Layer w6: R25.2 3276.49,5058.99 3387,5169.5 U8.12
U11_6: C30.1 U11.6 | length 195.5
  Top Layer w14: C30.1 U11.6
U11_13: R31.1 U11.13 | length 311.3
  Top Layer w10: R31.1 3816.5,2866 3847.5,2835 3982.5,2835 4014,2866.5 U11.13
U11_42: C29.1 U11.42 | length 132.9
  Top Layer w14: C29.1 U11.42
U13_3: C31.1 C33.2 D5.2 U13.3 | length 598.1
  Top Layer w20: v2(5016.31,4443.88) 5016.3,4493.8 5058.5,4536 C31.1 5111,4643.94 C33.2
  Bottom Layer w44: U13.3 v2(5016.31,4443.88) 5075.38,4443.88 D5.2
VCC: C15.2 C16.2 C19.1 C24.1 C26.2 C36.1 D4.1 D5.1 IC1.7 IC2.7 R27.1 U9.1 | length 8320.3
  Top Layer w10: R27.1 4262.86,4514.64 4480,4297.5 5235,4297.5 v2(5385,4447.5)
  Top Layer w20: C26.2 5485.44,4812.06 C24.1 5618.7,4678.8 C19.1
  Top Layer w30: IC1.7 C16.2 ; IC2.7 C15.2
  Top Layer w32: IC1.7 v2(5515,2657.5) ; IC2.7 v2(5515,3372.5)
  Top Layer w40: v2(5515,2612.5) v2(5515,2702.5) ; v2(5515,3327.5) v2(5515,3417.5)
  Top Layer w60: C19.1 C36.1 6326.3,4678.8 U9.1@6326.3,4705.3
  Top Layer w110: v2(5500,3902.18) v2(5500,3997.5) v2(5585.14,4082.64) v2(5657.52,4155.02) ; v2@5660,4157.5 v2@5736.79,4234.29 ; v2@5734.31,4231.81 5801.9,4299.4 5870.42,4367.92 6006.7,4504.2 6088.95,4586.45 6207.82,4705.32 U9.1
  Bottom Layer w44: D5.1 5447.5,4447.5 5653.87,4241.13 v2@5653.87,4151.37 ; D4.1 5392.5,5187.5 5944.19,4635.81 v2@5944.19,4441.69
  Bottom Layer w110: v2@5500,2617.5 5500,4012.5 v2@5642.52,4155.02 ; v2@5645,4157.5 6195.28,4707.78 U9.1@6313.78,4707.78
  other v2: 5729.43,4231.81 5801.33,4299.4 5873.24,4367.92 5945.14,4441.7 6015,4510 6088.95,4586.45
pads on no net: B2. BUZZER1.3 BUZZER1.4 CARD2. CARD2.1 CARD2.8 CARD2.9 H2.4 H2.5 H7. H7.1 H8. H8.1 H9. H9.1 H10. H10.1 H11. U2.3 U2.5 U2.7 U2.9 U5.1 U5.4 U5.5 U5.8 U5.9 U5.14 U5.15 U5.16 U5.18 U5.23 U5.24 U5.27 U5.28 U5.29 U5.35 U5.36 U5.37 U5.40 U5.41 U5.42 U5.45 U5.46 U5.47 U5.48 U5.49 U5.50 U5.51 U5.52 U5.53 U5.54 U5.55 U5.56 U5.57 U5.58 U5.59 U5.60 U5.65 U5.66 U5.67 U5.68 U5.69 U5.70 U5.71 U5.72 U5.73 U5.74 U5.75 U5.76 U5.77 U5.79 U5.82 U5.83 U5.84 U5.85 U5.86 U5.87 U5.88 U5.89 U5.90 U5.91 U5.92 U5.93 U5.94 U5.95 U7.3 U7.7 U11.1 U11.7 U11.8 U11.9 U11.10 U11.11 U11.22 U11.25 U11.26 U11.27 U11.33 U11.37 U11.38 U11.39 U11.40 U12.1 U12.4 X2.

## Polygon pours and split planes (outlines as drawn)
GND on Top Layer (solid): 5415,5642.5 5415,2162.5 5430,2147.5 6520,2147.5 6535,2162.5 6535,5592.5 6480,5647.5 5410,5647.5
GND on Top Layer (solid): 1505,2442.5 1505,5357.5 1740,5592.5 5405,5592.5 5435,5562.5 5435,2212.5 5430,2207.5 5435,2207.5 5430,2207.5 1740,2207.5 1505,2442.5
GND on Bottom Layer (solid): 5410,5702.5 5410,2222.5 5425,2207.5 6515,2207.5 6530,2222.5 6530,5652.5 6475,5707.5 5405,5707.5
GND on Bottom Layer (solid): 1500,2442.5 1500,5357.5 1735,5592.5 5400,5592.5 5430,5562.5 5430,2212.5 5425,2207.5 5430,2207.5 5425,2207.5 2270,1500 1500,2442.5

## Keep-outs
Keep-Out Layer:
  lines w10: 1685,2462.5 ccw(c1785,2462.5) 1785,2362.5 ; 1685,5262.5 cw(c1785,5262.5) 1785,5362.5 ; 6385,2362.5 ccw(c6385,2462.5) 6485,2462.5 ; 6385,5362.5 cw(c6385,5262.5) 6485,5262.5

## Other copper
Top Layer:
  region net M+: 5744.99,2807.49 5744.99,2812.47 5869.99,3007.49 5994.99,3007.49 6120.62,3123.79 6270.86,3123.79 6408.58,3123.79 6418.74,3112.48 6429.1,3099.66 6418.74,3112.48 6440,3087.48 6440,2937.48 6119.99,2657.49 6044.99,2657.49 5919.99,2657.49 5744.99,2807.49
  region net M-: 5752.63,3523.48 5765.54,3523.48 5940.75,3698.69 6090.98,3698.69 6103.5,3686.17 6429.01,3360.66 6429.01,3197.9 6391.45,3160.34 6153.58,3160.34 5978.31,3335.61 5940.49,3335.61 5752.63,3523.48
Bottom Layer:
  region net M-: 5751.25,3525 5764.16,3525 5939.37,3700.21 6089.61,3700.21 6102.13,3687.69 6427.64,3362.18 6427.64,3199.42 6390.08,3161.86 6152.2,3161.86 5976.93,3337.14 5939.11,3337.14 5751.25,3525
  region net M+: 5743.75,2807.5 5743.75,2812.48 5868.75,3007.5 5993.75,3007.5 6119.38,3123.8 6269.62,3123.8 6407.34,3123.8 6417.5,3112.49 6427.86,3099.67 6417.5,3112.49 6438.76,3087.49 6438.76,2937.49 6118.75,2657.5 6043.75,2657.5 5918.75,2657.5 5743.75,2807.5
  rectangle net M-: 5590,3332.5 5895,3717.5
  rectangle net M+: 5590,2617.5 5895,3002.5

## Silkscreen, mask and mechanical layers (free items; w line width, h text height)
Top Overlay:
  text "32u4" at 4114.37,5164.99 h25
  text "2560" at 4325,5165 h25
  text "C32" at 4625,4485 h45
  text "A5" at 4375,2480 h25
  text "Pin5" at 4465,2480 h25
Bottom Overlay:
  text "VEN Medikal için KoEm Elektronik Yazılım AR-GE tarafından tasarlanmıştır. 03.21" at 3220,2385 h40